# Altium PCB pfc_PCB.PcbDoc
Units mm, origin at the board's own origin, x right, y up, seen from the top; angles counter-clockwise.
Board outline 125.05 x 78.1 mm, 2 copper layers (Top Layer, Bottom Layer); 81 components, 51 nets, 299 pads, 245 vias.
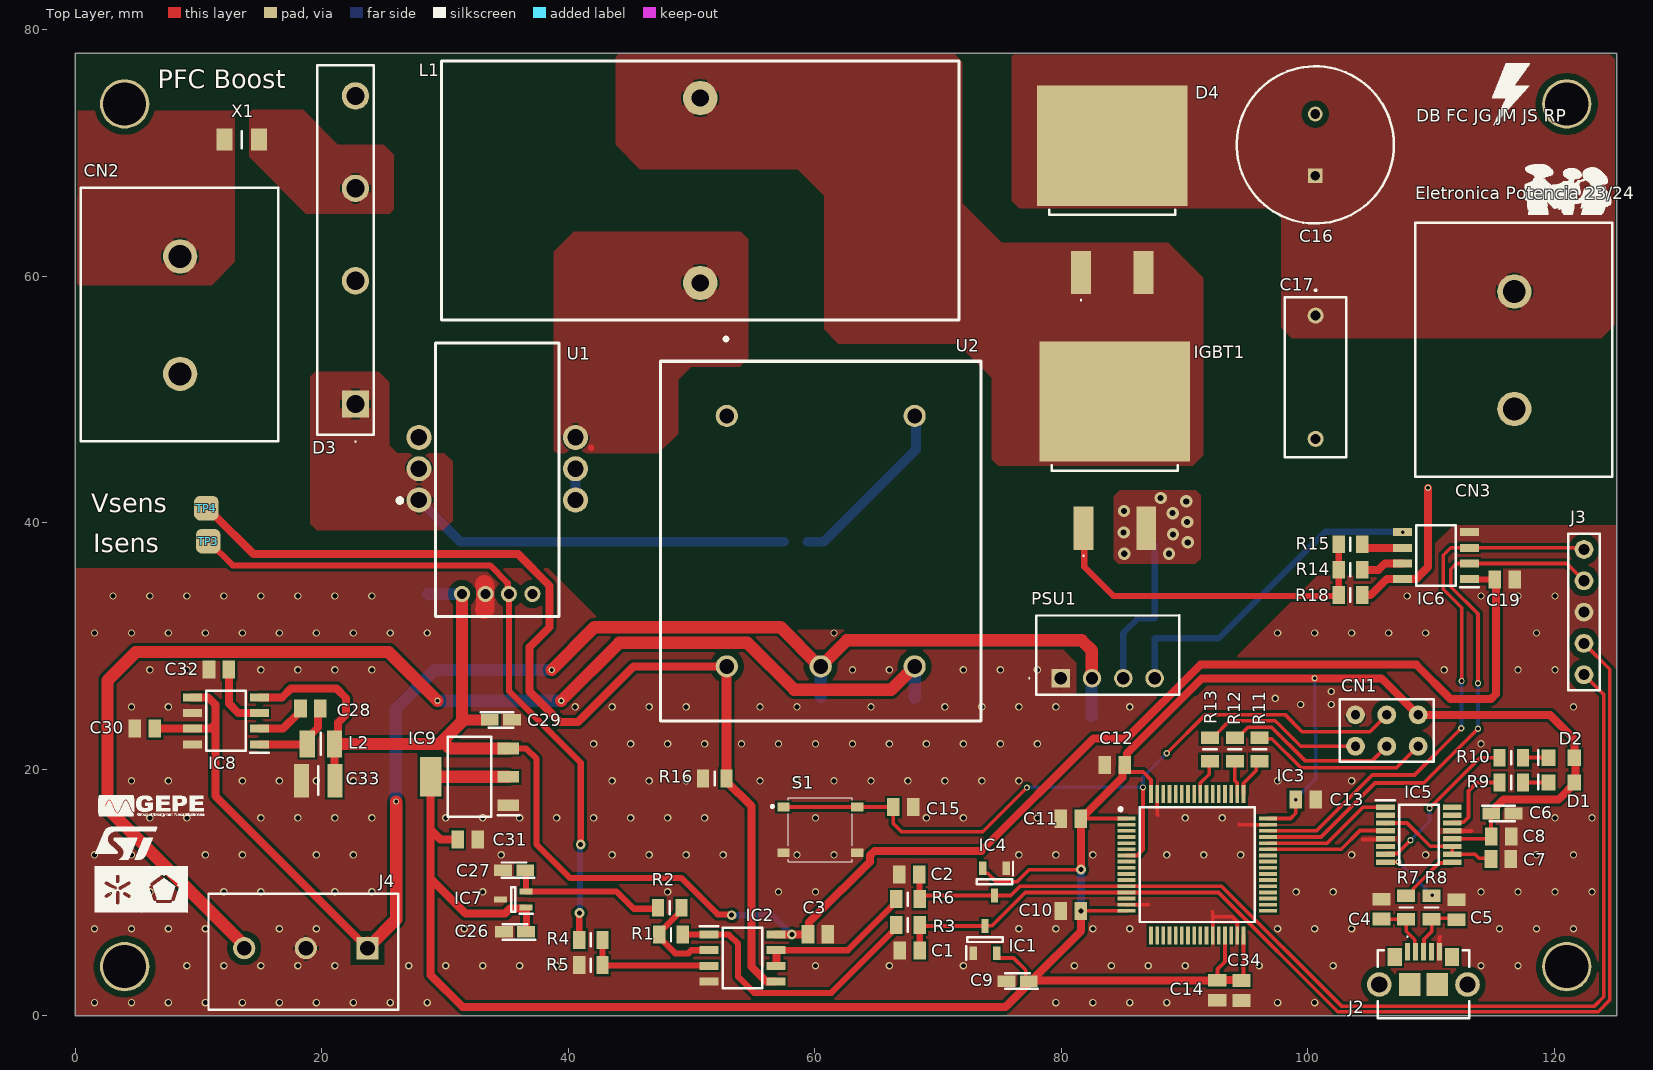
[diagram p0: Top Layer view]
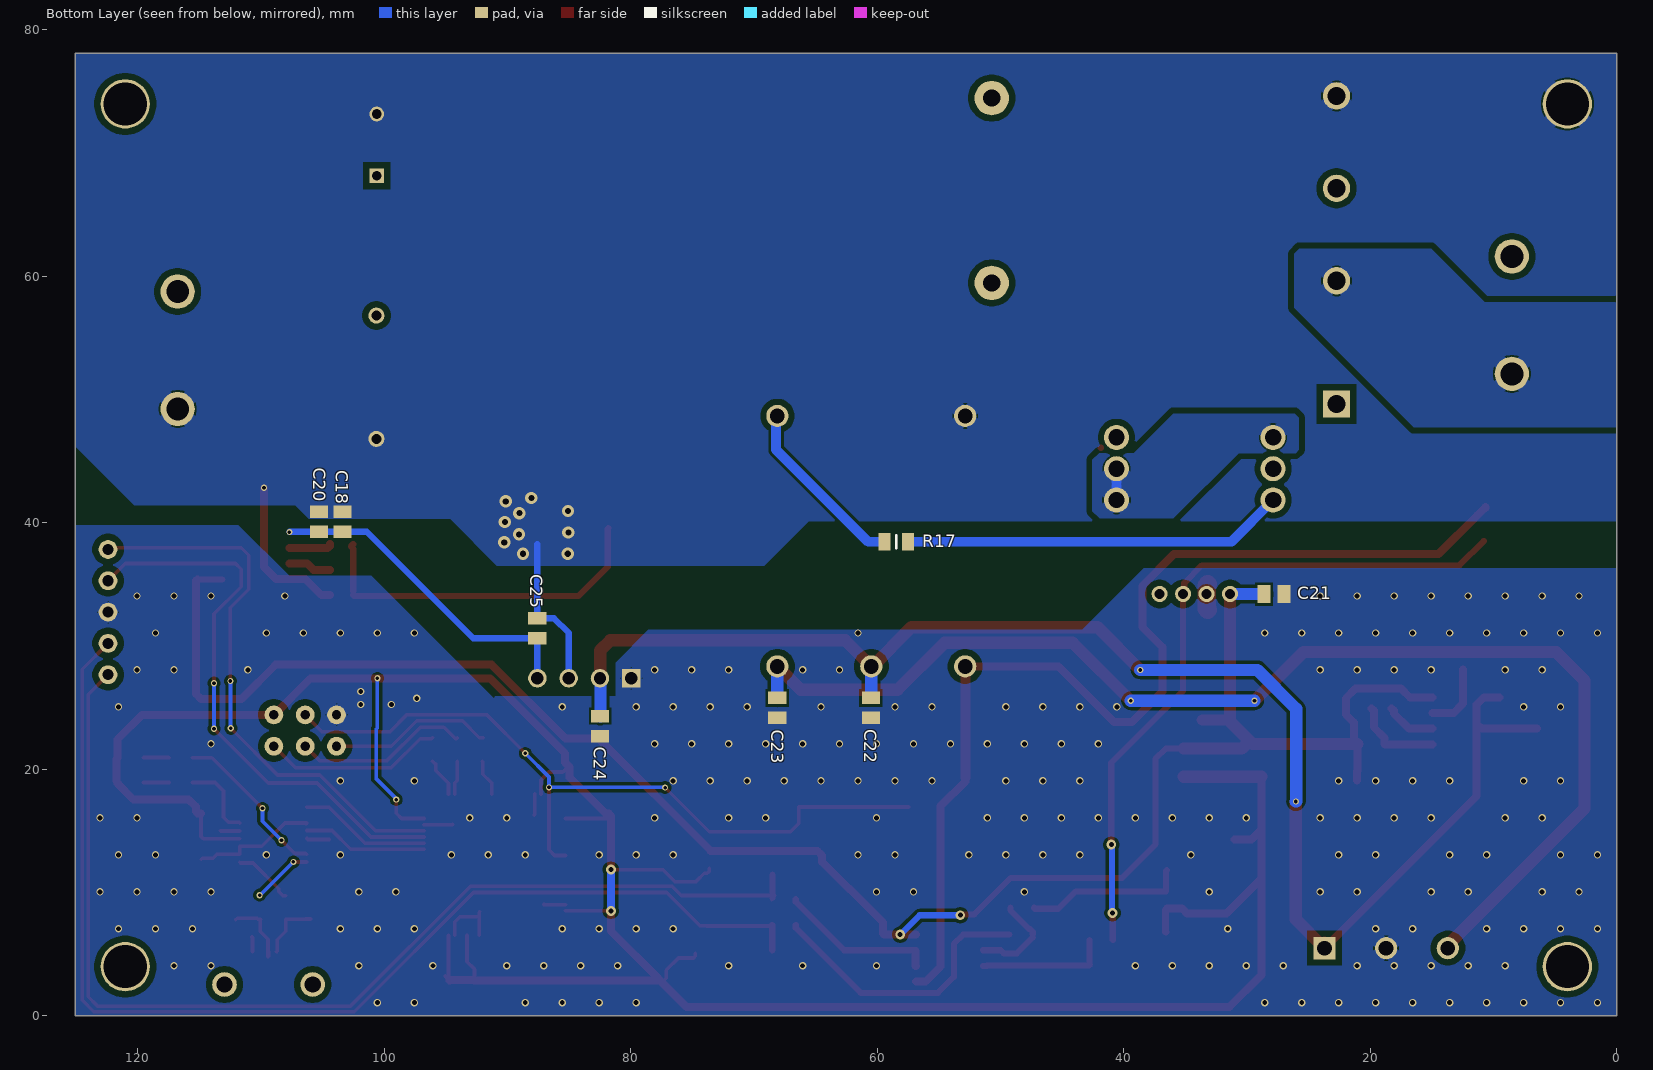
[diagram p1: Bottom Layer view, seen from below]
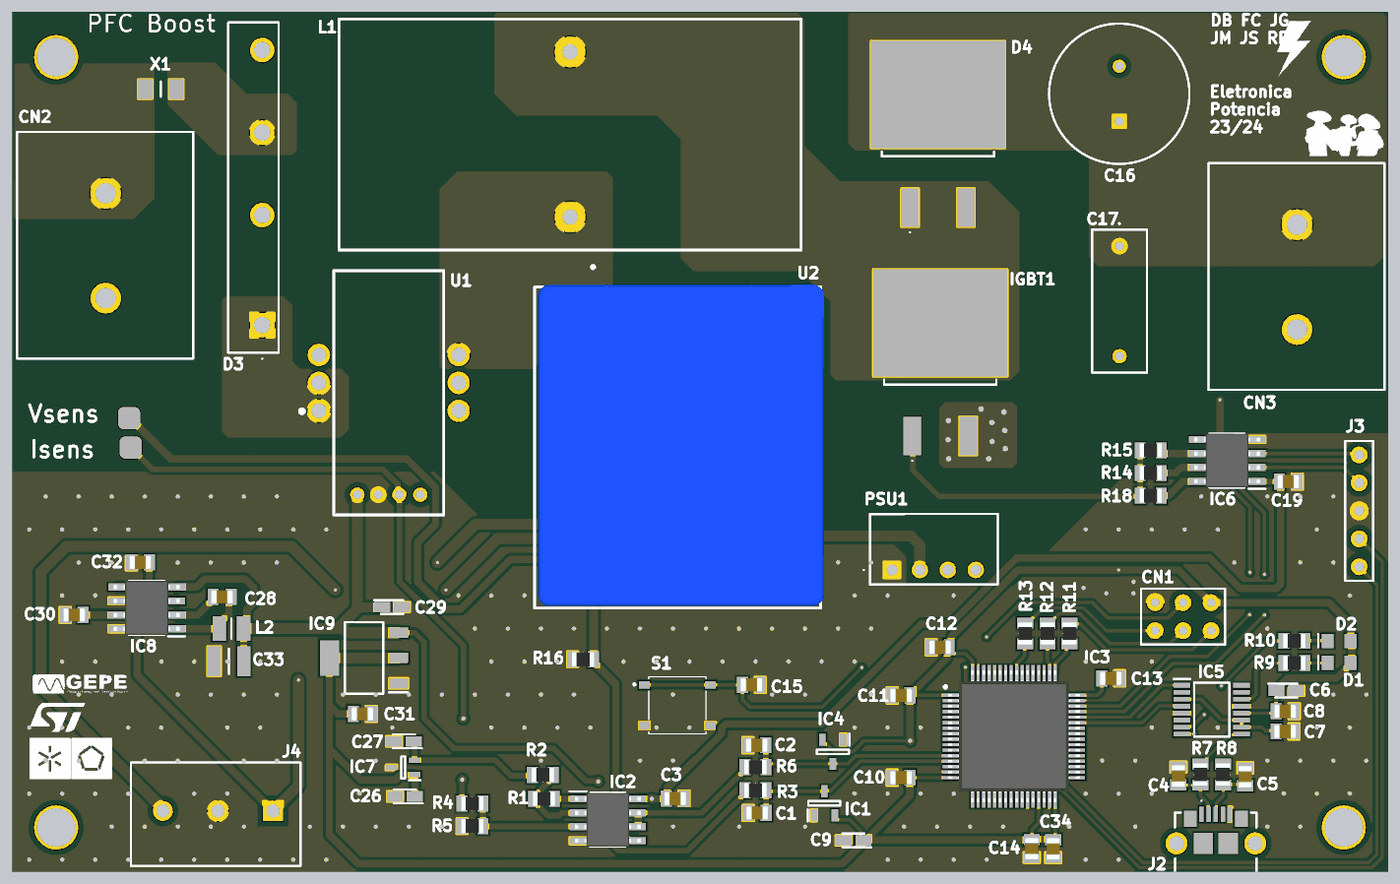
[diagram p2: 3D render of the assembled board from above, using the file's embedded part models]
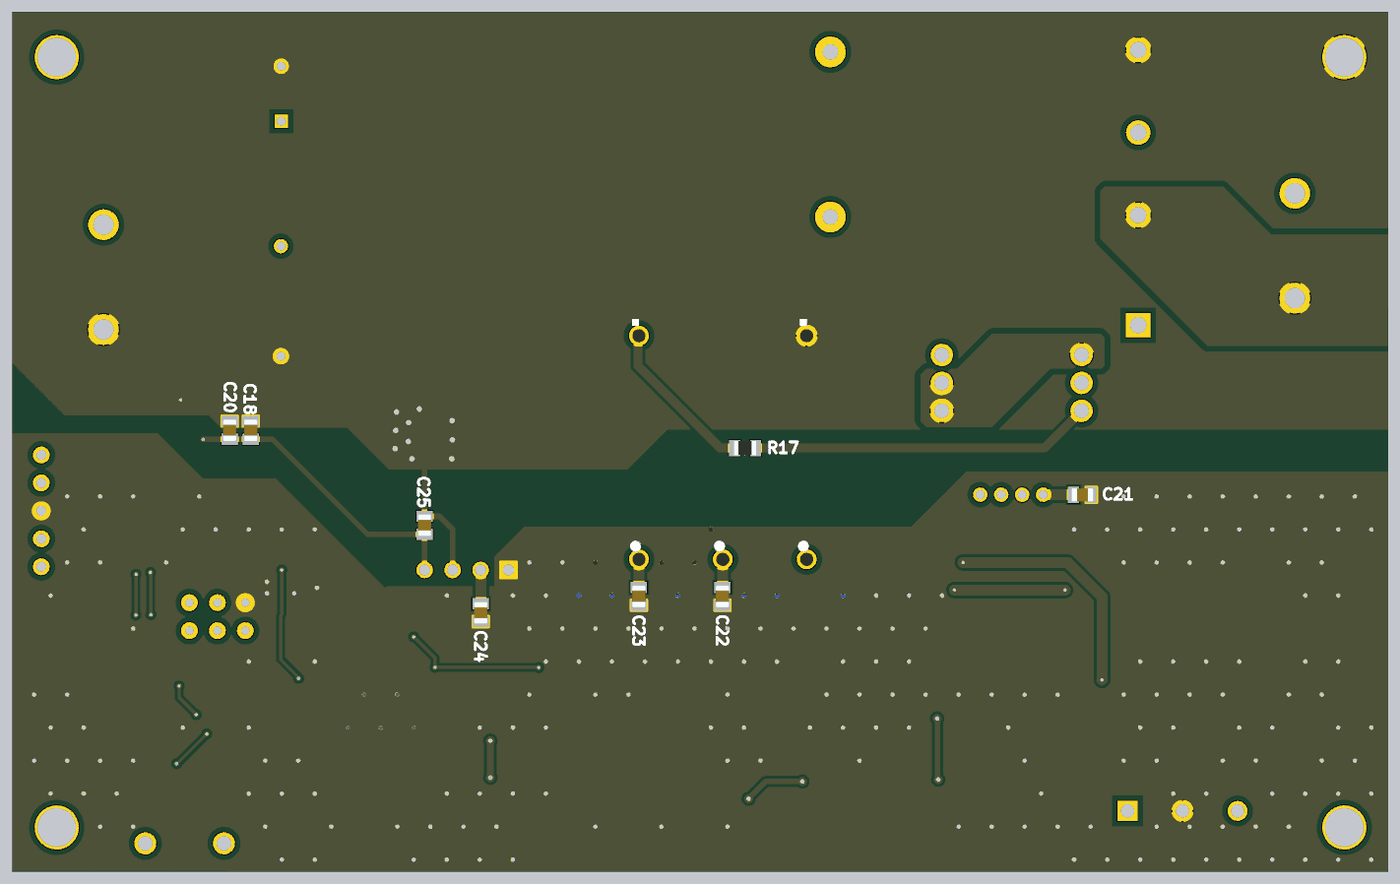
[diagram p3: 3D render of the assembled board from below, using the file's embedded part models]

## Layer stack, top to bottom
Top Solder: solder mask 0.0102, Solder Resist, Dk 3.5
Top Layer: signal copper 0.0356
Dielectric 1: dielectric 0.32, FR-4, Dk 4.8
Bottom Layer: signal copper 0.0356
Bottom Solder: solder mask 0.0102, Solder Resist, Dk 3.5

## Board outline
0,0 125.05,0 125.05,78.1 0,78.1

## Design rules (kind name [scope] priority, off if disabled: settings)
Clearance [All] p1: gap=0.254 ignorepadtopadclearanceinfootprint=FALSE except(0: Arc-Hole Track-Hole SMDPad-Hole THPad-Hole Via-Hole Fill-Hole Poly-Hole Region-Hole Text-Hole; 0.127: Arc-Arc Arc-Track Track-Track SMDPad-SMDPad; 0.2: Arc-SMDPad Track-SMDPad SMDPad-THPad SMDPad-Fill SMDPad-Poly SMDPad-Region; 0.5: THPad-THPad THPad-Fill THPad-Poly THPad-Region Fill-Fill Fill-Poly Fill-Region Poly-Poly Poly-Region Region-Region)
PlaneClearance [All] p1: clearance=1
PlaneConnect [All] p1: planeconnectstyle=Relief reliefexpansion=0.508 reliefentries=4 reliefconductorwidth=0.5 reliefairgap=0.254
PolygonConnect [All] p1: thpad.connectstyle=Relief thpad.reliefconductorwidth=1.2 thpad.reliefentries=4 thpad.polygonreliefangle="45 Angle" thpad.airgapwidth=0.127 smdpad.connectstyle=Direct smdpad.reliefconductorwidth=0.5 smdpad.reliefentries=4 smdpad.polygonreliefangle="45 Angle" smdpad.airgapwidth=0.254 via.connectstyle=Direct via.reliefconductorwidth=0.5 via.reliefentries=4 via.polygonreliefangle="45 Angle" via.airgapwidth=0.254
RoutingVias [All] p1: holewidth=0.4 width=0.8 viastyle="Through Hole" minholewidth=0.3 minwidth=0.5 maxholewidth=1 maxwidth=1.5
SolderMaskExpansion SolderMaskExpansion_Via [IsVia] p1: expansion=0.102 istentingtop=TRUE
SolderMaskExpansion [All] p2: expansion=0.102 istentingtop=FALSE
Width [All] p1: maxlimit=2.5 minlimit=0.127 preferedwidth=0.5 minimp=50.000000 maximp=50.000000 favimp=50.000000
28 further rules are at their usual default settings.

## Classes and differential pairs
component class U_uController: C1 C2 C3 C4 C5 C6 C7 C8 C9 C10 C11 C12 C13 C14 C15 C34 CN1 D1 D2 IC1 IC2 IC3 IC4 IC5 J2 J3 R1 R2 R3 R4 R5 R6 R7 R8 R9 R10 R11 R12 R13 S1
component class U_powerReg: C24 C25 C26 C27 C28 C29 C30 C31 C32 C33 CN2 CN3 IC7 IC8 IC9 J4 L2 PSU1 X1
component class U_converter: C16 C17 C18 C19 C20 C21 C22 C23 D3 D4 IC6 IGBT1 L1 R14 R15 R16 R17 R18 TP3 TP4 U1 U2

## Components (designator, comment, footprint, x,y, rotation, side; value= is the part's Value field where it differs from the comment)
C1 "10nF" CAPACITOR_0805 67.7,5.325 r180 top
C2 "100nF" CAPACITOR_0805 67.665,11.475 r180 top
C3 "100nF" CAPACITOR_0805 60.25,6.625 r0 top
C4 "47pF" CAPACITOR_0805 105.975,8.675 r90 top
C5 "47pF" CAPACITOR_0805 112.05,8.61 r90 top
C6 "4.7uF" "Capacitor 0805 polaryzed" 115.775,16.435 r0 top
C7 "100nF" CAPACITOR_0805 115.665,12.725 r0 top
C8 "100nF" CAPACITOR_0805 115.675,14.56 r0 top
C9 "4.7uF" "Capacitor 0805 polaryzed" 76.45,2.825 r180 top
C10 "100nF" CAPACITOR_0805 80.775,8.525 r180 top
C11 "100nF" CAPACITOR_0805 80.775,16 r180 top
C12 "100nF" CAPACITOR_0805 84.325,20.375 r180 top
C13 "100nF" CAPACITOR_0805 99.825,17.55 r0 top
C14 "1uF" CAPACITOR_0805 92.65,2.075 r270 top
C15 "100nF" CAPACITOR_0805 67.175,16.95 r0 top
C16 "100uF" "CAP 20x12.5" 100.6,68.15 r90 top
C17 "220nF" "CAPACITOR 220nF" 100.625,56.825 r270 top
C18 "10uF" CAPACITOR_0805 103.375,40.1 r90 bottom
C19 "100nF" CAPACITOR_0805 115.96,35.425 r0 top
C20 "100nF" CAPACITOR_0805 105.275,40.1 r90 bottom
C21 "100nF" CAPACITOR_0805 27.8,34.225 r180 bottom
C22 "100nF" CAPACITOR_0805 60.5,25 r270 bottom
C23 "100nF" CAPACITOR_0805 68.1,25 r270 bottom
C24 "100nF" CAPACITOR_0805 82.475,23.515 r270 bottom
C25 "100nF" CAPACITOR_0805 87.575,31.46 r90 bottom
C26 "1uF" "Capacitor 0805 polaryzed" 35.675,6.825 r180 top
C27 "1uF" "Capacitor 0805 polaryzed" 35.6,11.825 r180 top
C28 "100nF" CAPACITOR_0805 19.075,24.95 r0 top
C29 "1uF" "Capacitor 0805 polaryzed" 34.525,24.025 r0 top
C30 "10uF" CAPACITOR_0805 5.64,23.315 r180 top
C31 "2.2uF" CAPACITOR_0805 31.825,14.325 r0 top
C32 "1uF" CAPACITOR_0805 11.65,28.1 r180 top
C33 "47uF" CAPACITOR_1210 19.7,19.1 r180 top
C34 "100nF" CAPACITOR_0805 94.6,2.065 r270 top
CN1 "Conector 1x6P" "Header 2x3" 103.86,21.885 r0 top
CN2 "conector 2Pin" NC6P10802 8.5,61.625 r270 top
CN3 "conector 2Pin" NC6P10802 116.75,58.775 r270 top
D1 "LED" "LED 0805" 120.575,18.95 r0 top
D2 "LED" "LED 0805" 120.575,20.95 r0 top
D3 "rectifierBridge" GBI10M 22.725,49.65 r90 top
D4 "Diode dual" D2PAK 84.125,67.258 r0 top
IC1 "bat54s" BAT54S 73.8,6.2 r90 top
IC2 "TSX712IDT" SO-8 54.125,4.7 r0 top
IC3 "STM32G474RET6" QFP50P1200X1200X160-64N 91.025,12.275 r0 top
IC4 "bat54s" BAT54S 74.575,10.875 r270 top
IC5 "FT230XS-R" SSOP-16 109,14.7 r0 top
IC6 "stgap2s" SO-8 110.4,37.35 r180 top
IC7 "TS3320ACR" SOT323 35.525,9.45 r180 top
IC8 "L6982N50DR" SO-8 12.225,23.95 r180 top
IC9 "Linear Regulator" SOT-223-4 31.975,19.4 r180 top
IGBT1 "IGBT" D2PAK 84.335,46.508 r0 top
J2 "UJ2-MIBH2-4-SMT-TR" UJ2MIBH24SMTTR 109.375,2.6 r0 top
J3 "Conector 1x5P" "HEADER 1X5" 122.4,27.69 r90 top
J4 "Conector 1x3P" "Conector 1x3 Screw" 23.7,5.5 r180 top
L1 "500u" "INDUCTOR 500u" 50.7,59.475 r90 top
L2 "1uH" "Inductor 1005" 19.925,22.075 r0 top value=1u
PSU1 "PDSE1-S15-S15-S" PDSE1-S15-S15-S 79.945,27.4 r0 top
R1 "13.2k" RESISTOR_0805 48.325,6.6 r0 top
R2 "10k" RESISTOR_0805 48.225,8.775 r0 top
R3 "290" RESISTOR_0805 67.55,7.375 r0 top
R4 "10k" RESISTOR_0805 41.825,6.175 r0 top
R5 "13.2k" RESISTOR_0805 41.825,4.125 r180 top
R6 "10k" RESISTOR_0805 67.55,9.475 r0 top
R7 "27R" RESISTOR_0805 107.975,8.8 r90 top
R8 "27R" RESISTOR_0805 110.025,8.8 r90 top
R9 "330R" RESISTOR_0805 116.5,18.95 r0 top
R10 "330R" RESISTOR_0805 116.5,20.95 r0 top
R11 "47R" RESISTOR_0805 96.075,21.625 r90 top
R12 "47R" RESISTOR_0805 94.075,21.625 r90 top
R13 "47R" RESISTOR_0805 92.05,21.625 r90 top
R14 "Resistor" RESISTOR_0805 103.45,36.2 r180 top
R15 "Resistor" RESISTOR_0805 103.45,38.275 r180 top
R16 "132" RESISTOR_0805 51.875,19.275 r180 top
R17 "5k6" RESISTOR_0805 58.45,38.475 r0 bottom
R18 "Resistor" RESISTOR_0805 103.45,34.15 r0 top
S1 "pushButton" Push_Button 60.45,15.1 r0 top
TP3 "TestPoint" TestPoint 10.775,38.525 r0 top
TP4 "TestPoint" TestPoint 10.625,41.2 r0 top
U1 "LTSR_25-NP" LTSR25-NP 34.225,32.4 r90 top
U2 "LV25P" LV-25-P/LV-20-P 60.475,38.525 r270 top
X1 "Fuse" "Fuse 1206" 13.5,71.1 r0 top

## Footprints (in the part's own frame and the unit in brackets; to place one, negate y for a bottom-side part, rotate by r counter-clockwise, add the part's x,y. Pads: shape width x height; smd on the part's side, far side on the other; paste and mask are expansions set on the pad)
BAT54S [mm]
  rect 1.1x0.6 smd: 1(-1.1,0.95) 2(-1.1,-0.95) 3(1.1,0)
  silkscreen extent -1.65,-1.45 0.2,1.5
"CAP 20x12.5" [mm]
  rect 1.2x1.2 / inner round 1.2 / far side rect 1.2x1.2 hole 0.8: 1(0.025,0)
  round 1.2 hole 0.8: 2(5.025,0)
  silkscreen extent -3.85,-6.38 8.9,6.37
"CAPACITOR 220nF" [mm]
  round 1.3 hole 0.8: 1(0,0) 2(10,0)
  silkscreen extent -2.1,-2.5 11.5,2.5
"Capacitor 0805 polaryzed" [mm]
  rect 1.45x0.95 smd: 1(-0.9,0) 2(0.9,0)
  silkscreen extent -1.63,-0.63 1,0.63
CAPACITOR_0805 [mm]
  rect 1.02x1.47 smd: 1(-0.81,0) 2(0.81,0)
  body extent -1,-0.63 1,0.63, height 0.94
CAPACITOR_1210 [mm]
  rect 1.22x2.72 smd: 1(-1.35,0) 2(1.35,0)
  silkscreen extent 0,-1.15 0,1.15
"Conector 1x3 Screw" [mm]
  rect 1.8x1.8 hole 1.2: 1(0,0)
  round 1.8 hole 1.2: 2(5,0) 3(10,0)
  silkscreen extent -2.5,-4.4 12.9,5
D2PAK [mm]
  rect 1.6x3.5 smd: 1(-2.54,-6.933) 3(2.54,-6.933)
  rect 12.2x9.75 smd: 2(0,3.342)
  silkscreen extent -5.1,-9.23 5.1,-1.83
"Fuse 1206" [mm]
  rect 1.3x1.8 smd: 1(-1.405,0) 2(1.405,0)
  silkscreen extent 0,-0.69 0,0.69
GBI10M [mm] "Rectifier Bridge"
  rect 2.22x2.22 hole 1.48: 1(0,0)
  round 2.22 hole 1.48: 2(10,0) 3(17.5,0) 4(25,0)
  silkscreen extent -3.1,-1.5 27.5,3.1
"HEADER 1X5" [mil]
  round 60 hole 35.43: 1(0,0) 2(100,0) 3(200,0) 4(300,0) 5(400,0)
  silkscreen extent -50,-50 450,50
"Header 2x3" [mil]
  round 60 hole 30: 1(0,0) 2(100,0) 3(200,0) 4(0,100) 5(100,100) 6(200,100)
  silkscreen extent -50,-50 250,150
"INDUCTOR 500u" [mm]
  round 2.8 hole 1.4: 1(0,0) 2(15,0)
  silkscreen extent -3,-21 18,21
"Inductor 1005" [mm]
  rect 1.25x2.2 smd: 1(-1.1,0) 2(1.1,0)
  silkscreen extent 0,-0.9 0,0.9
"LED 0805" [mm]
  rect 1.1x1.3 smd: 1(-1.05,0) 2(1.05,0)
  silkscreen extent -1.9,-0.58 -1.9,0.63
LTSR25-NP [mm]
  round 2.03 hole 1.33: 1(9.46,6.35) 2(12,6.35) 3(14.54,6.35) 4(14.54,-6.35) 5(12,-6.35) 6(9.46,-6.35)
  round 1.31 hole 0.81: 7(1.84,-2.857) 8(1.84,-0.952) 9(1.84,0.953) 10(1.84,2.857)
  silkscreen extent 0,-5 22.2,8.07
LV-25-P/LV-20-P [mm]
  round 1.8 hole 1.2: 1(-10.16,-7.62) 2(10.16,-7.62) 3(10.16,0) 4(10.16,7.62) 5(-10.16,7.62)
  silkscreen extent -16.54,-13 14.6,13, body extent -14.8,-12.7 14.4,13.3, height 16.4
NC6P10802 [mm]
  round 2.781 hole 1.854: 1(0,0) 2(9.525,0)
  silkscreen extent -5.59,-8.05 15.01,7.95
PDSE1-S15-S15-S [mm]
  rect 1.5x1.5 hole 1: 1(0,0)
  round 1.5 hole 1: 2(2.54,0) 3(5.08,0) 4(7.62,0)
  silkscreen extent -2.6,-1.33 9.61,5.1
Push_Button [mm]
  rect 1x0.7 smd: 1(-3,1.85) 2(3,1.85) 3(-3,-1.85) 4(3,-1.85)
  silkscreen extent -4,-2.6 2.6,2.6
QFP50P1200X1200X160-64N [mm]
  rect 1.475x0.3 smd: 1(-5.738,3.75) 2(-5.738,3.25) 3(-5.738,2.75) 4(-5.738,2.25) 5(-5.738,1.75) 6(-5.738,1.25) 7(-5.738,0.75) 8(-5.738,0.25) 9(-5.738,-0.25) 10(-5.738,-0.75) 11(-5.738,-1.25) 12(-5.738,-1.75) 13(-5.738,-2.25) 14(-5.738,-2.75) 15(-5.738,-3.25) 16(-5.738,-3.75) 33(5.738,-3.75) 34(5.738,-3.25) 35(5.738,-2.75) 36(5.738,-2.25) 37(5.738,-1.75) 38(5.738,-1.25) 39(5.738,-0.75) 40(5.738,-0.25) 41(5.738,0.25) 42(5.738,0.75) 43(5.738,1.25) 44(5.738,1.75) 45(5.738,2.25) 46(5.738,2.75) 47(5.738,3.25) 48(5.738,3.75)
  rect 0.3x1.475 smd: 17(-3.75,-5.738) 18(-3.25,-5.738) 19(-2.75,-5.738) 20(-2.25,-5.738) 21(-1.75,-5.738) 22(-1.25,-5.738) 23(-0.75,-5.738) 24(-0.25,-5.738) 25(0.25,-5.738) 26(0.75,-5.738) 27(1.25,-5.738) 28(1.75,-5.738) 29(2.25,-5.738) 30(2.75,-5.738) 31(3.25,-5.738) 32(3.75,-5.738) 49(3.75,5.738) 50(3.25,5.738) 51(2.75,5.738) 52(2.25,5.738) 53(1.75,5.738) 54(1.25,5.738) 55(0.75,5.738) 56(0.25,5.738) 57(-0.25,5.738) 58(-0.75,5.738) 59(-1.25,5.738) 60(-1.75,5.738) 61(-2.25,5.738) 62(-2.75,5.738) 63(-3.25,5.738) 64(-3.75,5.738)
  silkscreen extent -6.35,-4.65 4.65,4.65, body extent -6,-6 6,6, height 1.6
RESISTOR_0805 [mm]
  rect 1x1.45 smd: 1(-0.95,0) 2(0.95,0)
  silkscreen extent 0,-0.54 0,0.54, body extent -1,-0.64 1,0.64, height 0.65
SO-8 [mm]
  rect 1.525x0.65 smd: 1(-2.712,1.905) 2(-2.712,0.635) 3(-2.712,-0.635) 4(-2.712,-1.905) 5(2.712,-1.905) 6(2.712,-0.635) 7(2.712,0.635) 8(2.712,1.905)
  silkscreen extent -3.47,-2.45 1.6,2.58, body extent -3,-2.45 3,2.45, height 1.75
SOT323 [mm]
  rect 1.05x0.5 smd: 1(-1.05,0.65) 2(-1.05,-0.65) 3(1.05,0)
  silkscreen extent -1.58,-1 0.18,1.15
SOT-223-4 [mm]
  rect 1.75x0.95 smd: 1(-3.15,2.3) 2(-3.15,0) 3(-3.15,-2.3)
  rect 1.75x3.2 smd: 4(3.15,0)
  silkscreen extent -4.03,-3.25 1.75,3.25
SSOP-16 [mm]
  rect 1.526x0.435 smd: 1(-2.712,2.222) 2(-2.712,1.588) 3(-2.712,0.952) 4(-2.712,0.318) 5(-2.712,-0.318) 6(-2.712,-0.952) 7(-2.712,-1.588) 8(-2.712,-2.222) 9(2.712,-2.222) 10(2.712,-1.588) 11(2.712,-0.952) 12(2.712,-0.318) 13(2.712,0.318) 14(2.712,0.952) 15(2.712,1.588) 16(2.712,2.222)
  silkscreen extent -3.47,-2.45 1.6,2.79
TestPoint [mm]
  rrect50% 2x2 smd: 1(0,0)
UJ2MIBH24SMTTR [mm]
  rect 0.4x1.4 smd: 1(-1.3,2.6) 2(-0.65,2.6) 3(0,2.6) 4(0.65,2.6) 5(1.3,2.6)
  round 1.995 hole 1.33: MH1(-3.575,-0.05) MH2(3.575,-0.05)
  rect 1.15x1.45 smd: MP1(-2.32,2.18) MP4(2.32,2.18)
  rect 1.75x1.9 smd: MP2(-1.125,-0.05) MP3(1.125,-0.05)
  silkscreen extent -3.7,-2.8 3.7,3.87

## Part data
C1 C2 C3 C4 C5 C7 C8 C10 C11 C12 C13 C14 C15 C16 C17 C18 C19 C20 C21 C22 C23 C24 C25 C28 C30 C31 C32 C33 C34: library part Capacitor
C6 C9 C26 C27 C29: library part "Capacitor polaryzed"
IC3: "Integrated Circuit", Manufacturer_Name=STMicroelectronics, Mouser Part Number=511-STM32G474RET6, Arrow Part Number=STM32G474RET6, Arrow Price/Stock=https://www.arrow.com/en/products/stm32g474ret6/stmicroelectronics?region=nac, Datasheet Link=https://www.st.com/resource/en/datasheet/stm32g474re.pdf, Height=1.6mm, Manufacturer_Part_Number=STM32G474RET6, Mouser Price/Stock=https://www.mouser.co.uk/ProductDetail/STMicroelectronics/STM32G474RET6?qs=PzGy0jfpSMvUBs7PMTDqlg%3D%3D
J2: "Connector", Manufacturer_Name="CUI Devices", Mouser Part Number=490-UJ2-MIBH2-4-SMT, Arrow Part Number=UJ2-MIBH2-4-SMT-TR, Arrow Price/Stock=https://www.arrow.com/en/products/uj2-mibh2-4-smt-tr/cui-devices?region=nac, Datasheet Link=https://www.cui.com/product/resource/digikeypdf/uj2-mibh2-4-smt.pdf, Height=2.5mm, Manufacturer_Part_Number=UJ2-MIBH2-4-SMT-TR, Mouser Price/Stock=https://www.mouser.co.uk/ProductDetail/CUI-Devices/UJ2-MIBH2-4-SMT-TR?qs=5mqXD9RfOg1yxHIpPvPxvQ%3D%3D
L1 L2: library part Inductor, "Inductor", SimulationGenericComponent=True
R1 R2 R3 R4 R5 R6 R7 R8 R9 R10 R11 R12 R13: library part Resistor
R16: library part Resistor, "82.5 mW"
R17: library part Resistor, "140 mW"
U1: "Undefined or Miscellaneous", Manufacturer_Name=LEM, Manufacturer_Part_Number="LTSR 25-NP", Datasheet Link=https://datasheet.datasheetarchive.com/originals/distributors/Datasheets-16/DSA-314824.pdf
U2: "Undefined or Miscellaneous", Manufacturer_Name=LEM, Manufacturer_Part_Number=LV25P
X1: CURRENT=1, RESISTANCE=1m, SimulationGenericComponent=True

## Free pads (board coordinates)
  round 4 hole 3.5: 2(4,4) 2(4,74) 2(121,4) 2(121,74)

## Via types
v1: diameter 0.6, hole 0.4, Top Layer to Bottom Layer, tented both sides, 210 vias
v2: diameter 0.5, hole 0.3, Top Layer to Bottom Layer, tented both sides, 19 vias
v3: diameter 1, hole 0.5, Top Layer to Bottom Layer, tented both sides, 10 vias
v4: diameter 0.8, hole 0.4, Top Layer to Bottom Layer, tented both sides, 6 vias

## Nets (pads, with @x,y where several pads share a name; then routed paths per layer and width w, separated by ;. In a path a pad name is that pad's centre, name@x,y a point inside that pad or via, vN(x,y) a via of type N, cw(c..) or ccw(c..) an arc to the next point about the centre after c; other vN are vias at no path point)
+3V3: C6.1 C8.1 C9.1 C10.1 C11.1 C12.1 C13.1 C14.1 C26.1 C31.1 C34.1 CN1.6 D1.2 D2.2 IC1.2 IC3.1 IC3.16 IC3.29 IC3.32 IC3.48 IC3.64 IC4.2 IC5.12 IC7.1 IC9.2 IC9.4 | length 229.1
  Top Layer w0.3: IC4.2 73.625,11.725 73.775,11.575 74.025,11.575 74.7,10.9 76.425,10.9 77.4,11.875 81.575,11.875 v4(81.6,11.875) ; IC1.2 74.75,4.85 74.9,4.7 76.125,4.7 77.106,3.719 77.106,3.069 C9.1 ; C11.1 81.61,16.025 IC3.1 ; v4(81.6,8.525) IC3.16 ; C12.1@85.135,20.15 85.495,19.79 86.635,19.79 87.275,19.15 IC3.64 ; C14.1@92.69,2.925 92.675,2.94 92.675,3.8 93.275,4.4 IC3.29 ; C34.1@94.65,2.925 94.775,3.05 IC3.32 ; C34.1@94.695,2.88 C34.1@95.05,3.235 ; IC3.48 98.6,16.025 99.015,16.44 v2(99.015,17.55) ; IC5.12 114.687,14.382 C8.1 ; C8.1@114.85,14.575 114.85,16.41 C6.1
  Top Layer w0.5: C34.1 94.69,2.875 C34.1@94.695,2.88
  Top Layer w0.6: C26.1 36.6,6.85 IC7.1@36.6,8.6
  Top Layer w0.65: IC9.4 28.825,15.125 ; C31.1 29.625,14.325 28.825,15.125 ; IC7.1@36.5,8.725 35.25,8.725 34.85,8.325 31.65,8.325 28.825,11.15 ; C9.1@77.452,2.723 75.454,0.725 31.425,0.725 28.825,3.325 28.825,11.15 ; C9.1@77.573,2.867 C9.1@77.642,2.867 ; v4@81.575,11.875 81.575,15.99 C11.1 81.585,16.225 81.77,16.41 81.995,16.41 84.95,19.365 84.95,20.19 85.32,20.56 85.32,21.311 91.391,27.382 100.537,27.382 v2(100.55,27.395) 105.97,27.395 CN1.6 119.65,24.425 121.625,22.45 D2.2 121.725,20.85 121.725,19.05 D1.2 121.625,18.85 120.35,17.575 115.873,17.575 115.275,16.977 115.275,16.585 115.125,16.435 C6.1 ; v4(81.6,8.525) 81.585,8.51 81.585,6.879 77.75,3.044 77.75,2.975 C9.1@77.642,2.867 ; C34.1@94.695,2.88 94.65,2.925 92.69,2.925 C14.1 92.632,2.867 C9.1@77.642,2.867 ; 28.825,11.15 28.825,15.125
  Top Layer w1: IC9.4 IC9.2
  Bottom Layer w0.3: v4(81.6,8.525) v4@81.6,8.55 ; v2(99.015,17.55) 99.015,17.604 99.115,17.704 99.115,17.727 100.65,19.262 100.65,23.251 100.55,23.351 v2(100.55,27.395)
  Bottom Layer w0.65: v4@81.6,8.55 v4(81.6,11.875)
+5v: C3.1 C19.1 C21.1 C29.1 C33.1 IC2.8 IC6.1 IC8.4 IC9.3 L2.2 U1.10 | length 161.1
  Top Layer w0.5: IC9.3 36.575,21.7 37.425,20.85 37.425,13.9 40.125,11.2 49.15,11.2 52.118,8.232 53.193,8.232 v4(53.25,8.175) ; IC6.1@113.132,35.425 C19.1
  Top Layer w0.65: IC8.4 16.777,25.855 17.497,26.575 21.175,26.575 21.975,25.775 21.975,24.453 21.325,23.803 21.325,22.375 L2.2 21.037,22.062 21.037,19.888 21.025,19.875 21.05,19.85 C33.1 ; IC2.8 v4(58.128,6.605) 59.42,6.605 C3.1 59.525,6.71 59.525,7.6 62.175,10.25 62.219,10.25 64.475,12.506 64.475,13.019 64.856,13.4 73.5,13.4 82.6,22.5 85.278,22.5 91.281,28.503 108.797,28.503 111.575,25.725 114.869,25.725 115.25,26.106 115.25,35.325 C19.1
  Top Layer w0.9: 31.367,24 33.6,24 C29.1
  Top Layer w1: L2.2@21.037,22.062 29.537,22.062 31.367,23.892 31.367,24 U1.10 ; 29.788,22.313 30.4,21.7 IC9.3
  Bottom Layer w0.5: v4(53.25,8.175) 56.558,8.175 v4(58.128,6.605)
  Bottom Layer w1: C21.1 28.61,34.23 28.62,34.24 U1.10
+15v: C22.1 C24.1 C30.1 IC8.5 IC8.7 J4.1 PSU1.2 U2.3 | length 122.3
  Top Layer w0.65: C30.1 IC8.7 10.969,23.315 11.35,23.696 ; IC8.5 10.77,25.855 11.35,25.275 11.35,23.696 ; J4.1@23.387,5.813 11.35,17.85 11.35,23.696 ; J4.1 23.7,5.813 J4.1@23.7,6.125
  Top Layer w1: J4.1@23.9,5.7 26.025,7.825 v2(26.025,17.4) ; v2(38.65,28.075) 42.125,31.55 57.204,31.55 60.389,28.365 U2.3 62.585,30.475 81.65,30.475 82.475,29.65 PSU1.2@82.475,27.35 ; PSU1.2@82.45,27.325 PSU1.2@82.475,27.35 ; PSU1.2 82.485,27.36 PSU1.2@82.475,27.35
  Bottom Layer w1: J4.1 23.7,5.675 J4.1@23.75,5.725 ; v2(26.025,17.4) 26,17.425 26,24.925 29.15,28.075 v2(38.65,28.075) ; U2.3 60.488,28.352 60.488,25.91 60.498,25.9 C22.1@60.5,25.9 ; C24.1 82.475,24.7 82.45,24.725 82.45,27.365 PSU1.2
+15V_P: C18.1 C20.1 C25.1 IC6.5 PSU1.4 | length 27.4
  Top Layer w0.5: PSU1.4@87.45,27.5 87.55,27.4 PSU1.4 PSU1.4@87.75,27.585
  Bottom Layer w0.5: PSU1.4 87.575,27.41 C25.1 92.775,30.65 101.415,39.29 C18.1 103.585,39.29 103.6,39.275 103.615,39.29 C20.1 107.653,39.29 v2(107.688,39.255)
-15v: C23.1 J4.3 U2.4 | length 101.4
  Top Layer w1: J4.3 13.7,5.525 13.8,5.625 13.791,5.625 13.547,5.87 13.547,5.878 2.6,16.825 2.6,27.225 4.91,29.535 25.415,29.535 v2(29.375,25.575) ; v2(39.425,25.575) 44.125,30.275 54.525,30.275 58.325,26.475 66.205,26.475 U2.4 U2.4@68.165,28.365
  Bottom Layer w1: v2(29.375,25.575) v2(39.425,25.575) ; U2.4 68.1,28.36 C23.1
AC_1: D3.3 X1.2
AC_2: CN2.2 D3.2
GND: C1.2 C2.2 C3.2 C4.2 C5.2 C6.2 C7.2 C8.2 C9.2 C10.2 C11.2 C12.2 C13.2 C14.2 C15.2 C19.2 C21.2 C22.2 C23.2 C24.2 C26.2 C27.2 C29.2 C30.2 C31.2 C32.2 C33.2 C34.2 CN1.4 IC1.1 IC2.4 IC3.15 IC3.27 IC3.31 IC3.47 IC3.63 IC4.1 IC5.5 IC5.13 IC6.4 IC7.3 IC8.6 IC8.8 IC9.1 J2.5 J3.3 J4.2 PSU1.1 R5.2 R16.2 S1.3 S1.4 U1.9 | length 17.8
  Top Layer w0.3: IC3.15 85.825,9.025 87,9.025 87.025,9.05 ; IC3.63 87.775,16.35 87.825,16.3 ; 92.25,8.45 92.275,8.425 IC3.27 ; 92.35,8.05 93.85,8.05 94.275,7.625 IC3.31 ; 94.425,15.55 94.45,15.525 IC3.47 ; 104.475,14.325 106.175,14.325 106.25,14.4 106.268,14.382 IC5.5 ; J2.5 110.675,6.35 110.725,6.4 ; IC5.13 111.73,15 113.25,15 113.275,15.025
  Top Layer w1.5: 33.17,35.022 33.272,34.919 U1.9 33.272,33.047 33.175,32.95
  other v1: 1.55,1.075 4.55,1.075 7.55,1.075 10.55,1.075 13.55,1.075 16.55,1.075 19.55,1.075 22.55,1.075 25.55,1.075 28.55,1.075 79.55,1.075 82.55,1.075 85.55,1.075 88.55,1.075 97.55,1.075 100.55,1.075 9.05,4.075 12.05,4.075 15.05,4.075 18.05,4.075 21.05,4.075 27.05,4.075 30.05,4.075 33.05,4.075 36.05,4.075 39.05,4.075 60.05,4.075 66.05,4.075 72.05,4.075 81.05,4.075 84.05,4.075 87.05,4.075 90.05,4.075 96.05,4.075 102.05,4.075 114.05,4.075 117.05,4.075 1.55,7.075 4.55,7.075 7.55,7.075 10.55,7.075 16.55,7.075 19.55,7.075 31.55,7.075 76.55,7.075 79.55,7.075 82.55,7.075 85.55,7.075 97.55,7.075 100.55,7.075 103.55,7.075 115.55,7.075 118.55,7.075 121.55,7.075 3.05,10.075 6.05,10.075 12.05,10.075 15.05,10.075 21.05,10.075 24.05,10.075 33.05,10.075 48.05,10.075 57.05,10.075 60.05,10.075 99.05,10.075 102.05,10.075 114.05,10.075 117.05,10.075 120.05,10.075 123.05,10.075 1.55,13.075 4.55,13.075 10.55,13.075 13.55,13.075 19.55,13.075 22.55,13.075 34.55,13.075 43.55,13.075 46.55,13.075 49.55,13.075 52.55,13.075 58.55,13.075 61.55,13.075 76.55,13.075 79.55,13.075 82.55,13.075 88.55,13.075 91.55,13.075 94.55,13.075 103.55,13.075 109.55,13.075 118.55,13.075 121.55,13.075 6.05,16.075 9.05,16.075 15.05,16.075 18.05,16.075 21.05,16.075 24.05,16.075 30.05,16.075 33.05,16.075 36.05,16.075 39.05,16.075 42.05,16.075 45.05,16.075 48.05,16.075 51.05,16.075 60.05,16.075 69.05,16.075 72.05,16.075 78.05,16.075 90.05,16.075 93.05,16.075 120.05,16.075 123.05,16.075 4.55,19.075 7.55,19.075 13.55,19.075 16.55,19.075 19.55,19.075 22.55,19.075 43.55,19.075 46.55,19.075 49.55,19.075 55.55,19.075 58.55,19.075 61.55,19.075 64.55,19.075 67.55,19.075 70.55,19.075 73.55,19.075 76.55,19.075 97.55,19.075 103.55,19.075 42.05,22.075 45.05,22.075 48.05,22.075 51.05,22.075 54.05,22.075 57.05,22.075 60.05,22.075 63.05,22.075 66.05,22.075 69.05,22.075 72.05,22.075 75.05,22.075 78.05,22.075 114.05,22.075 4.55,25.075 7.55,25.075 40.55,25.075 43.55,25.075 46.55,25.075 49.55,25.075 55.55,25.075 58.55,25.075 64.55,25.075 70.55,25.075 73.55,25.075 76.55,25.075 79.55,25.075 85.55,25.075 121.55,25.075 99.415,25.274 101.897,25.274 97.35,25.769 101.897,26.324 6.05,28.075 9.05,28.075 15.05,28.075 18.05,28.075 21.05,28.075 24.05,28.075 63.05,28.075 66.05,28.075 72.05,28.075 75.05,28.075 78.05,28.075 111.05,28.075 117.05,28.075 120.05,28.075 1.55,31.075 4.55,31.075 7.55,31.075 10.55,31.075 13.55,31.075 16.55,31.075 19.55,31.075 22.55,31.075 25.55,31.075 28.55,31.075 61.55,31.075 97.55,31.075 100.55,31.075 103.55,31.075 106.55,31.075 109.55,31.075 118.55,31.075 3.05,34.075 6.05,34.075 9.05,34.075 12.05,34.075 15.05,34.075 18.05,34.075 21.05,34.075 24.05,34.075 108.05,34.075 114.05,34.075 117.05,34.075 120.05,34.075
GND_P: C16.2 C17.2 C18.2 C20.2 C25.2 CN3.2 D3.4 IC6.8 IGBT1.3 pad.2@4,74 PSU1.3 R18.2 U2.1 | length 25.7
  Top Layer w0.5: C17.2@100.575,46.875 C17.2 ; CN3.2 116.75,49.075 CN3.2@116.775,49.05
  Top Layer w0.65: R18.2 105.1,34.15 106.4,35.45 106.405,35.445 IC6.8 108.77,35.445 109.75,36.425 v2(109.75,42.856)
  Bottom Layer w0.5: PSU1.3 85.025,31.075 86.22,32.27 C25.2 87.575,38.275
  other v3: 85.1,37.5 88.725,37.5 90.25,38.425 89.05,39.075 85.05,39.225 90.2,40.075 89.025,40.8 85.075,40.975 90.125,41.75 88.05,42.025
hpwm: IC3.45 IC6.2 J3.4 | length 46.1
  Top Layer w0.3: IC3.45 101.075,14.525 105.45,18.9 109.4,18.9 v2(113.8,23.3) ; v2(113.8,27) 113.8,32.625 111.6,34.825 111.6,36.25 112.065,36.715 IC6.2 120.995,36.715 J3.4
  Bottom Layer w0.3: v2(113.8,23.3) v2(113.8,27)
i_adc: C1.1 IC1.3 IC3.13 J3.2 R3.2 | length 93.4
  Top Layer w0.3: R3.2@68.505,7.37 68.575,7.3 IC1.3 73.824,7.324 74.374,7.324 77.075,10.025 IC3.13 92.75,10.025 102.425,0.35 123.55,0.35 124.5,1.3 124.5,28.13 J3.2
  Top Layer w0.5: R3.2@68.505,7.37 68.505,5.355 68.475,5.325 C1.1
iRead: R4.1 TP3.1 U1.8 | length 57.2
  Top Layer w0.5: TP3.1 12.75,36.55 33.65,36.55 35.075,35.125 35.075,34.342 U1.8 35.177,26.373 41,20.55 v4(41,13.9) ; R4.1 40.887,6.188 40.887,8.337 v4(40.9,8.35)
  Bottom Layer w0.5: v4(40.9,8.35) 40.95,8.4 40.95,13.85 v4(41,13.9)
Isense1: D3.1 R17.1 U1.1 U1.2 | length 31
  Bottom Layer w0.8: U1.1 31.26,38.475 R17.1
Isense2: L1.1 U1.4 | length 0.5
  Top Layer w0.5: U1.4@40.575,46.925 U1.4 U1.4@40.989,46.94 ; 41.829,46.1 41.85,46.1
lpwm: IC3.46 IC6.3 J3.5 | length 45.5
  Top Layer w0.3: IC3.46 100.7,15.025 105.225,19.55 108.65,19.55 v2(112.44,23.34) ; v2(112.475,27.175) 112.475,33.125 110.975,34.625 110.975,37.375 111.585,37.985 122.265,37.985 J3.5
  Bottom Layer w0.3: v2(112.44,23.34) 112.457,23.357 112.457,27.157 v2(112.475,27.175)
NetC7_1: C7.1 IC5.3 IC5.10 IC5.11 | length 10.2
  Top Layer w0.3: IC5.3 106.288,15.623 106.325,15.586 106.391,15.652 108.048,15.652 109.925,13.775 111.685,13.775 IC5.11 111.725,13.735 111.725,13.125 IC5.10 113.563,13.112 113.875,12.8 114.754,12.8 C7.1@114.842,12.712
NetC28_1: C28.1 IC8.2 | length 4.1
  Top Layer w0.65: IC8.2 16.855,23.315 18.08,24.54 18.08,24.765 C28.1
NetC28_2: C28.2 IC8.1 L2.1 | length 7.2
  Top Layer w0.65: IC8.1 L2.1@18.795,22.045 ; L2.1 18.825,22.55 19.7,23.425 19.7,24.765 C28.2
NetC32_1: C32.1 IC8.3 | length 5.5
  Top Layer w0.65: C32.1 12.46,25.34 13.215,24.585 IC8.3
NetCN1_1: CN1.1 R13.2 | length 13.4
  Top Layer w0.3: R13.2 91.95,22.575 92.275,22.575 93.65,23.95 97.35,23.95 99.415,21.885 CN1.1
NetCN1_2: CN1.2 R12.2 | length 14.4
  Top Layer w0.3: R12.2 94.075,22.552 94.135,22.492 94.217,22.492 95.15,23.425 97.05,23.425 99.756,20.719 105.234,20.719 CN1.2
NetCN1_3: CN1.3 R11.2 | length 14.6
  Top Layer w0.3: R11.2 96.149,22.501 97.074,22.501 99.425,20.15 107.205,20.15 CN1.3
NetCN2_1: CN2.1 X1.1 | length 0.6
  Top Layer w0.381: CN2.1 CN2.1@8.959,62.084
NetD1_1: D1.1 R9.2 | length 2.1
  Top Layer w0.3: R9.2 D1.1
NetD2_1: D2.1 R10.2 | length 2.1
  Top Layer w0.3: R10.2 117.475,20.975 119.5,20.975 D2.1
NetD4_1: D4.1 D4.3 IGBT1.2 L1.2
NetIC2_1: IC2.1 R1.2 R3.1 | length 23.3
  Top Layer w0.5: R1.2 49.35,6.6 49.352,6.602 51.41,6.602 IC2.1 53.02,6.605 53.775,5.85 53.775,3.175 55.075,1.875 61.325,1.875 66.6,7.15 R3.1
NetIC2_2: IC2.2 R1.1 R2.2 | length 7.6
  Top Layer w0.5: R1.1@47.375,6.375 48.675,5.075 49.725,5.075 49.975,5.325 51.403,5.325 IC2.2 ; R1.1 47.375,6.825 47.625,7.075 47.7,7.075 48.925,8.3 49.175,8.55 R2.2
NetIC2_3: IC2.3 R4.2 R5.1 | length 10.8
  Top Layer w0.5: R4.2 42.775,4.225 42.725,4.175 42.805,4.095 51.08,4.095 51.11,4.065 IC2.3
NetIC2_6: IC2.6 IC2.7 R6.1 | length 13
  Top Layer w0.5: IC2.7@56.9,5.28 56.892,5.28 IC2.7 62.685,5.335 66.6,9.25 R6.1
  Top Layer w0.65: IC2.6 56.9,4.065 IC2.7@56.9,5.28
NetIC5_7: IC5.7 R10.1 | length 13.1
  Top Layer w0.3: IC5.7 106.355,13.18 107.255,13.18 v2(108.325,14.25) ; v2(109.875,16.85) 113.975,20.95 R10.1
  Bottom Layer w0.3: v2(108.325,14.25) 109.875,15.8 v2(109.875,16.85)
NetIC5_8: IC5.8 R8.2 | length 5
  Top Layer w0.3: IC5.8 106.299,12.489 107.354,12.489 v2(107.365,12.5) ; R8.2 110.075,9.8 v2(110.1,9.8)
  Bottom Layer w0.3: v2(107.365,12.5) 110.065,9.8 v2(110.1,9.8)
NetIC5_9: IC5.9 R7.2 | length 5
  Top Layer w0.3: R7.2 108.2,9.75 108.55,10.1 108.55,10.325 110.636,12.411 111.645,12.411 IC5.9
NetIC5_14: IC5.14 R9.1 | length 6.4
  Top Layer w0.3: IC5.14 111.78,15.72 112.5,15.72 112.501,15.721 112.62,15.721 113.025,16.126 113.025,18.25 113.725,18.95 R9.1
NetIC6_6: IC6.6 R15.1 | length 3.5
  Top Layer w0.65: R15.1 104.4,38.15 104.575,37.975 106.8,37.975 106.81,37.985 IC6.6
NetIC6_7: IC6.7 R14.1 | length 3.5
  Top Layer w0.65: R14.1 105.725,36.2 106.24,36.715 106.79,36.715 IC6.7
NetR17_2: R17.2 U2.5 | length 14.7
  Bottom Layer w0.8: R17.2 60.725,38.475 68.193,45.943 68.193,48.587 U2.5
NetU1_3: U1.3 U1.5 U1.6 | length 2.5
  Bottom Layer w0.8: U1.6 U1.5
NRST: C15.1 CN1.5 IC3.7 S1.1 S1.2 | length 62.7
  Top Layer w0.3: S1.1 S1.2 C15.1 66.365,15.61 67.026,14.949 73.624,14.949 v2(77.2,18.525) ; IC3.7@85.275,13.025 IC3.7 86.169,13.025 86.621,13.477 v2(86.621,18.55) ; v2(88.549,21.31) 91.689,24.45 98.15,24.45 99.55,23.05 103.376,23.05 103.377,23.051 104.343,23.051 104.344,23.05 105.025,23.05 CN1.5
  Bottom Layer w0.3: v2(77.2,18.525) 77.225,18.55 v2(86.621,18.55) 86.621,19.382 v2(88.549,21.31)
out+: C16.1 C17.1 CN3.1 D4.2
PWM: IGBT1.1 R14.2 R15.2 R18.1 | length 28.8
  Top Layer w0.5: IGBT1.1 81.803,39.567 81.81,39.567 81.827,39.55 81.835,39.55 81.85,39.535 81.85,36.45 84.225,34.075 102.425,34.075 R18.1 ; R18.1@102.5,34.45 R14.2 102.5,37.9 102.7,38.1 102.525,38.275 R15.2
RX1: IC3.44 IC5.1 | length 10.7
  Top Layer w0.3: IC3.44 101.575,14.025 104.475,16.925 106.285,16.925 IC5.1
SWCLK: IC3.50 R12.1 | length 2.7
  Top Layer w0.3: R12.1 94.075,19.095 94.275,18.895 IC3.50
SWDIO: IC3.49 R11.1 | length 3.2
  Top Layer w0.3: IC3.49 94.775,18.875 95.801,19.901 95.801,20.401 R11.1
SWO: IC3.56 R13.1 | length 3
  Top Layer w0.3: IC3.56 91.275,18.7 91.275,18.895 92,19.62 92,20.625 R13.1
TX1: IC3.43 IC5.4 | length 10.2
  Top Layer w0.3: IC3.43 102.7,13.525 104.225,15.05 106.256,15.05 IC5.4
USBDM: C4.1 J2.2 R7.1 | length 5
  Top Layer w0.3: C4.1 106.335,7.865 106.35,7.85 R7.1 107.975,6.875 108.675,6.175 108.675,5.25 J2.2
USBDP: C5.1 J2.3 R8.1 | length 5.8
  Top Layer w0.3: J2.3 109.375,4.86 109.425,4.81 109.427,4.81 109.427,6.227 110.05,6.85 110.05,7.825 R8.1 110.225,7.85 110.3,7.925 111.925,7.925 C5.1
v_adc: C2.1 IC3.12 IC4.3 J3.1 R6.2 | length 89.2
  Top Layer w0.3: R6.2@68.55,9.425 R6.2 68.5,9.587 68.688,9.775 IC4.3 75.9,9.775 76.65,10.525 IC3.12 93,10.525 102.725,0.8 123.25,0.8 124,1.55 124,26.09 J3.1
  Top Layer w0.5: C2.1 68.487,11.463 68.487,9.837 68.425,9.775 68.5,9.7 R6.2@68.5,9.587
vRead: IC2.5 R16.1 TP4.1 U2.2 | length 86.4
  Top Layer w0.65: TP4.1 TP4.1@10.625,41.295 ; TP4.1@10.625,41.3 TP4.1@10.625,41.295 ; R16.1@52.84,19.29 52.84,19.035 54.85,17.025 54.85,4 56.055,2.795 IC2.5@56.825,2.795 ; U2.2 45.29,28.365 40.775,23.85 39.325,23.85 36.85,26.325 36.85,29.916 38.475,31.541 38.475,34.9 35.9,37.475 14.45,37.475 11.292,40.633 11.287,40.633 TP4.1@10.625,41.295
  Top Layer w0.8: R16.1@52.84,19.29 52.84,28.35 U2.2
vref: C27.1 IC7.2 R2.1 | length 13.1
  Top Layer w0.5: C27.1 36.575,11.75 IC7.2 43.9,10.1 45.3,8.7 47.2,8.7 R2.1
pads on no net: IC3.2 IC3.3 IC3.4 IC3.5 IC3.6 IC3.8 IC3.9 IC3.10 IC3.11 IC3.14 IC3.17 IC3.18 IC3.19 IC3.20 IC3.21 IC3.22 IC3.23 IC3.24 IC3.25 IC3.26 IC3.28 IC3.30 IC3.33 IC3.34 IC3.35 IC3.36 IC3.37 IC3.38 IC3.39 IC3.40 IC3.41 IC3.42 IC3.51 IC3.52 IC3.53 IC3.54 IC3.55 IC3.57 IC3.58 IC3.59 IC3.60 IC3.61 IC3.62 IC5.2 IC5.6 IC5.15 IC5.16 J2.1 J2.4 J2.MH1 J2.MH2 J2.MP1 J2.MP2 J2.MP3 J2.MP4 U1.7

## Polygon pours and split planes (outlines as drawn)
GND on Top Layer "GND_L01_P018" (solid, pour order 18): 125.025,0.05 125.025,39.775 124.975,39.825 111.825,39.825 107.7,35.7 100.75,35.7 90.975,25.925 81.2,25.925 81.225,25.95 81.225,28.65 78.55,31.325 43.35,31.325 38.35,36.325 0.025,36.325 0.025,0.025
GND_P on Top Layer "GND_P_L01_P013" (solid, pour order 13): 90.9,42.65 91.3,42.25 91.3,37.1 90.875,36.675 84.625,36.675 84.25,37.05 84.25,42.15 84.75,42.65
out+ on Top Layer "OUT+_L01_P010" (solid, pour order 10): 97.025,65.525 97.825,64.725 97.825,55.85 98.675,55 123.8,55 124.9,56.1 124.9,77.625 124.525,78 76.125,78 75.975,77.85 75.975,66.15 76.6,65.525
NetD4_1 on Top Layer "NETD4_1_L01_P009" (solid, pour order 9): 74.875,44.625 74.35,45.15 74.35,51.775 71.575,54.55 61.9,54.55 60.75,55.7 60.75,66.55 58.6,68.7 45.8,68.7 43.825,70.675 43.825,77.8 44.075,78.05 71.325,78.05 71.975,77.4 71.975,65.95 75.175,62.75 88.675,62.75 91.525,59.9 91.525,45.475 90.675,44.625
AC_1 on Top Layer "AC_1_L01_P006" (solid, pour order 6): 14.1,69.7 18.7,65.1 25.5,65.1 25.85,65.45 25.85,69.875 25.025,70.7 21.3,70.7 18.475,73.525 14.35,73.525 14.1,73.275
Isense2 on Top Layer "ISENSE2_L01_P005" (solid, pour order 5): 38.825,62 40.45,63.625 53.975,63.625 54.6,63 54.6,53.375 53.9,52.675 49.95,52.675 48.9,51.625 48.9,47.25 47.3,45.65 39.05,45.65 38.825,45.875
Isense1 on Top Layer "ISENSE1_L01_P004" (solid, pour order 4): 26.125,45.675 25.475,46.325 25.475,51.425 24.625,52.275 19.45,52.275 19.05,51.875 19.05,39.95 19.575,39.425 29.85,39.425 30.6,40.175 30.6,45 29.925,45.675
NetCN2_1 on Top Layer "NETCN2_1_L01_P000" (solid, pour order 0): 0.165,59.3 11.05,59.3 12.925,61.175 12.925,73.425 0.194,73.425
GND on Bottom Layer "GND_L02_P017" (solid, pour order 17): 125.025,0.05 125.025,39.775 124.975,39.825 111.825,39.825 107.7,35.7 101.05,35.7 91.125,25.775 90.975,25.925 81.2,25.925 81.225,25.95 81.225,28.65 78.55,31.325 43.35,31.325 38.35,36.325 0.025,36.325 0.025,0.025
GND_P on Bottom Layer "GND_P_L02_P014" (solid, pour order 14): 125.025,78.075 125.025,46.175 120.275,41.425 107.2,41.425 106.1,40.325 94.65,40.325 90.85,36.525 69.15,36.525 65.55,40.125 0.025,40.125 0.025,78.075
AC_2 on Bottom Layer "AC_2_L02_P003" (solid, pour order 3): 0.016,57.925 10.7,57.925 15.025,62.25 25.75,62.25 26.175,61.825 26.175,57.45 16.475,47.75 0.05,47.75
NetU1_3 on Bottom Layer "NETU1_3_L02_P001" (solid, pour order 1): 30.675,45.675 35.975,40.375 41.95,40.375 42.525,40.95 42.525,45.125 41.975,45.675 39.175,45.675 35.975,48.875 26.125,48.875 25.775,48.525 25.775,45.95 26.05,45.675

## Silkscreen, mask and mechanical layers (free items; w line width, h text height)
Top Overlay:
  drawing of 48 lines, arcs and shapes, not listed
  text "PFC Boost" at 6.681,75.29 h1.5
  text "DB FC JG JM JS RP" at 108.773,72.572 h1
  text "Eletronica Potencia 23/24" at 108.698,66.271 h1
  text "Vsens" at 1.279,40.879 h1.52
  text "Isens" at 1.454,37.629 h1.52